# Altium PCB CPU-board-multi.PcbDoc (part 3 of 3)
Units mil, origin at the board's own origin, x right, y up, seen from the top; angles counter-clockwise.
Board outline 3937 x 2607 mil, 6 copper layers (L1, Power, L2, L3, CommonGND, L4), stack 84 mil thick; 312 components, 216 nets, 1011 pads, 419 vias.
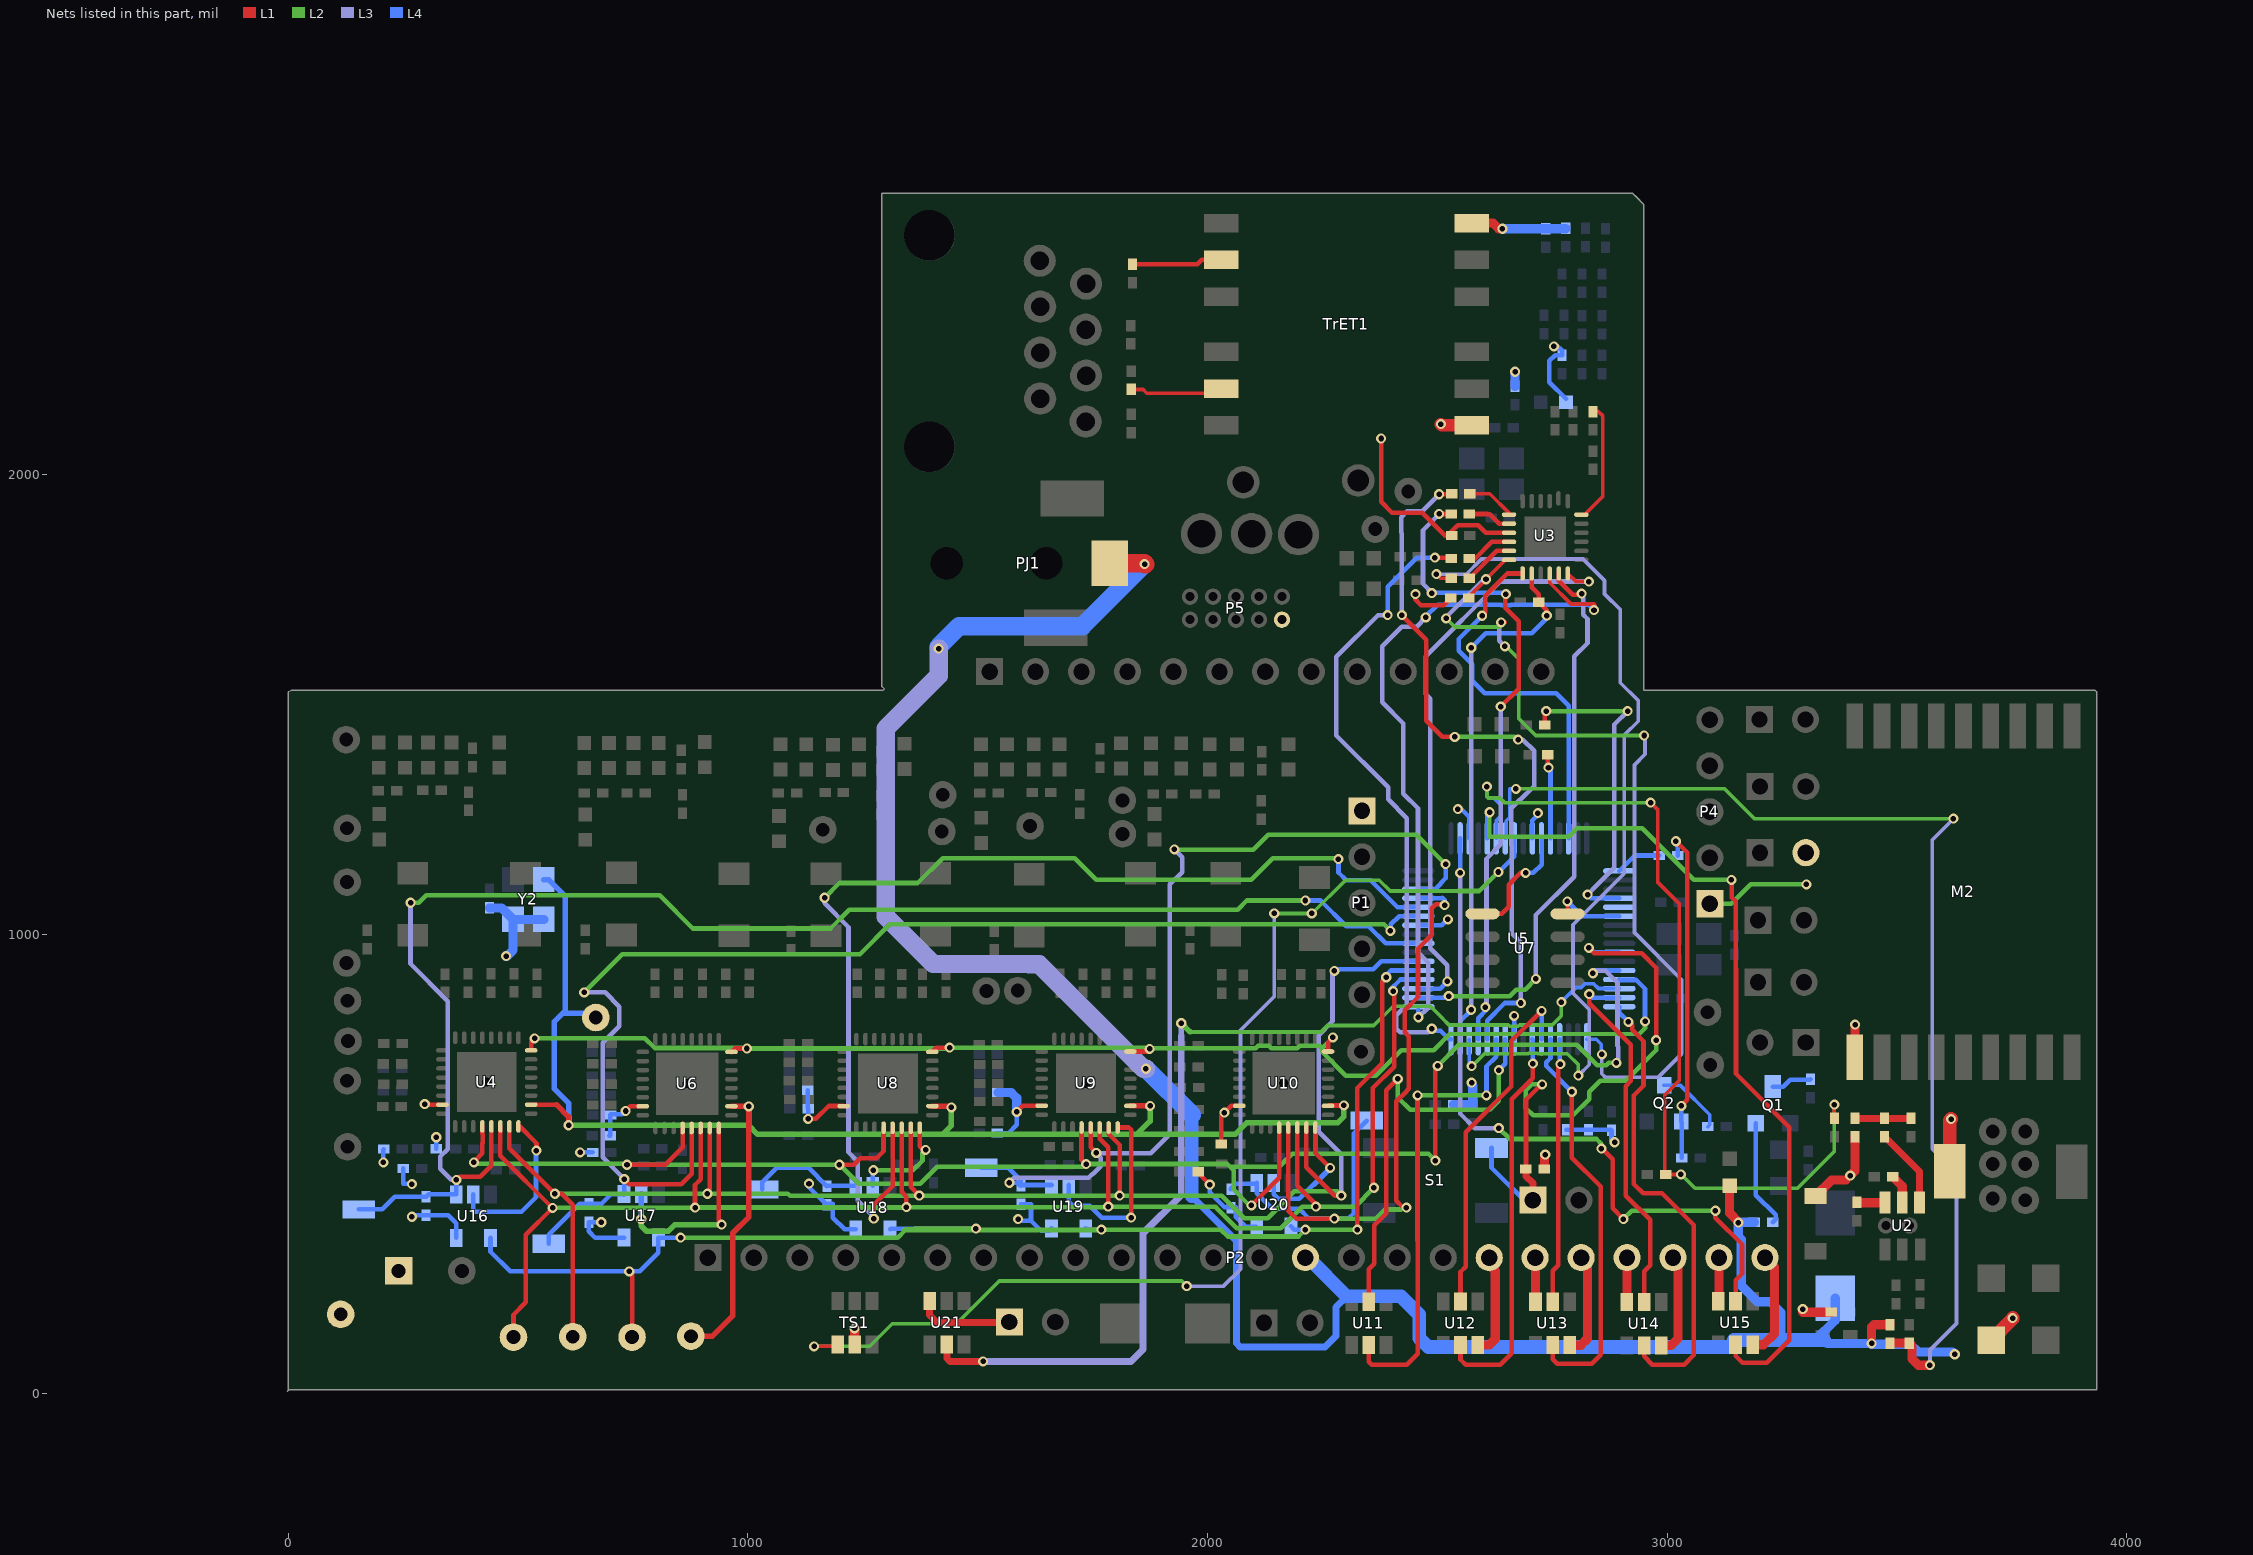
[diagram p7: the nets of this part, all layers, seen from the top]

## Via types
v1: diameter 22, hole 12, L1 to L4, 395 vias
v2: diameter 32, hole 20, L1 to L4, tented top, 19 vias
v3: diameter 22, hole 12, L1 to L4, tented top, 4 vias
v4: diameter 32, hole 18, L1 to L4, tented top, 1 vias

## Nets (pads, with @x,y where several pads share a name; then routed paths per layer and width w, separated by ;. In a path a pad name is that pad's centre, name@x,y a point inside that pad or via, vN(x,y) a via of type N, cw(c..) or ccw(c..) an arc to the next point about the centre after c; other vN are vias at no path point) (continued)
NetP2_18: P2.18 U12.3 | length 225.8
  L1 w20: U12.3@2588.13,106.53 2613.13,106.53 2626.13,119.53 2626.13,267.53 2613.13,280.53 P2.18@2613.13,296.53
NetP2_19: P2.19 U13.6 | length 96.2
  L1 w15: P2.19@2713.13,296.53 P2.19@2713.72,295.93
  L1 w20: U13.6@2713.72,200.53 P2.19@2713.72,295.93
NetP2_20: P2.20 U13.3 | length 226.4
  L1 w20: U13.3@2788.53,106.04 2812.64,106.04 2827.13,120.53 2827.13,282.53 P2.20@2813.13,296.53
NetP2_21: P2.21 U14.6 | length 96.7
  L1 w15: P2.21@2912.72,296.13 P2.21@2913.13,296.53
  L1 w20: U14.6@2912.72,200.02 P2.21@2912.72,296.13
NetP2_22: P2.22 U14.3 | length 223.4
  L1 w20: U14.3@2987.53,105.53 3009.13,105.53 3024.13,120.53 3024.13,285.53 P2.22@3013.13,296.53
NetP2_23: P2.23 U15.6 | length 95.6
  L1 w20: U15.6@3111.72,201.53 3113.13,202.93 P2.23@3113.13,296.53
NetP2_24: P2.24 U15.3 | length 231.4
  L1 w20: U15.3@3186.53,107.04 3209.64,107.04 3234.13,131.53 3234.13,275.53 P2.24@3213.13,296.53
NetP3_10: 
NetP5_1: P7.1 U21.6 | length 210.7
  L1 w15: U21.6@1395.72,202.02 1395.72,171.93 1412.13,155.53 1568.13,155.53 P7.1@1569.13,156.53
NetP6_1: P6.1 R121.2 S1.4 U5.42 | length 1289.4
  L1 w10: R121.2@2693.13,489.53 2693.13,640.19 2720.27,667.33 2721.93,667.33 v1(2728.13,673.53) ; v1(2830.13,970.53) 2831.13,970.53 2838.13,963.53 2838.13,961.53 2841.13,958.53 2945.13,958.53 2976.13,927.53 v1(2976.13,769.53)
  L1 w15: R121.2@2693.13,489.53 2693.13,473.53 2708.13,458.53 P6.1@2708.13,421.53
  L2 w10: v1(2728.13,673.53) 2705.43,673.53 2692.98,661.07 2692.98,621.7 2708.72,605.95 2795.34,605.95 2830.77,641.39 2830.77,657.71 2854.39,681.33 2909.98,681.33 2976.13,747.48 v1(2976.13,769.53)
  L4 w10: S1.4@2618.11,535.43 2618.17,535.37 2618.17,492.06 2689.32,420.91 2707.51,420.91 P6.1@2708.13,421.53 ; v1(2830.13,970.53) 2831.13,970.53 2841.02,960.64 U5.42@2896.13,960.64
NetQ1_C: Q1.C R10.2 | length 88.6
  L4 w10: Q1.C@3230.13,668.53 3253.13,668.53 3268.13,683.53 3311.13,683.53 R10.2@3312.13,684.53
NetQ1_E: Q1.E R4.1 | length 235.4
  L4 w10: Q1.E@3193.13,588.53 3193.13,432.57 3236.28,389.42 3236.28,379.69 R4.1@3230.13,373.53
NetQ2_B: Q2.B R13.1 R16.2 | length 735.7
  L1 w10: v1(3019.13,1202.53) 3043.73,1177.93 3043.73,640.13 3031.13,627.53 v1(3031.13,626.53)
  L4 w10: v1(3019.13,1202.53) 3023.13,1198.53 R13.1@3023.13,1171.53 ; Q2.B@3031.13,592.72 v1(3031.13,626.53) ; R16.2@3032.13,513.53 Q2.B@3032.13,591.33
NetQ2_C: Q2.C R9.1 | length 153.6
  L4 w8: Q2.C@2993.53,671.27 3029.24,671.27 3093.13,607.38 3093.13,585.53 R9.1@3089.13,581.53
NetR3_1: R3.1 R7.2 U5.23 | length 2481.7
  L1 w20: R3.1@3485.13,110.53 R7.2@3527.13,110.53 3533.13,104.53 3533.13,76.53 3547.13,62.53 v1(3572.13,62.53)
  L2 w8: v1(2671.13,1316.53) 3125.13,1316.53 3190.13,1251.53 v1(3623.13,1251.53)
  L3 w8: v1(3572.13,62.53) 3572.13,95.34 3629.98,153.2 3629.98,479.97 3576.83,533.12 3576.83,1205.24 v1(3623.13,1251.53)
  L4 w8: U5.23@2648.09,1208.67 2650.07,1210.65 2650.07,1246.89 2657.54,1254.36 2657.54,1316.53 v1(2671.13,1316.53)
NetR12_1: R12.1 R15.2 U5.22 | length 1933.5
  L1 w8: v1(2964.13,1286.53) 2980.13,1270.53 2980.13,1112.53 3026.93,1065.73 3026.93,682.33 2995.13,650.53 2995.13,479.53 R15.2@2997.13,477.53 3021.13,477.53 3021.13,478.53 3022.13,477.53 v1(3030.13,477.53) ; R12.1@3364.13,599.53 v1(3364.13,629.53)
  L2 w8: v1(2608.13,1321.53) 2608.13,1299.53 2611.13,1296.53 2636.13,1296.53 2646.13,1286.53 v1(2964.13,1286.53) ; v1(3030.13,477.53) 3022.13,477.53 3021.13,478.53 3030.13,478.53 3061.13,447.53 3284.13,447.53 3364.13,527.53 v1(3364.13,629.53)
  L4 w8: v1(2608.13,1321.53) 2608.13,1299.53 2611.13,1296.53 2623.13,1296.53 2638.13,1281.53 2638.13,1257.28 2628.41,1247.57 U5.22@2628.41,1208.67
NetR13_2: R13.2 U5.33 | length 101
  L4 w10: U5.33@2896.13,1137.8 2929.85,1171.53 R13.2@2983.13,1171.53
NetR14_2: R14.2 U2.6 | length 61.9
  L1 w20: R14.2@3413.13,416.53 3413.92,415.74 3473.53,415.74 U2.6@3474.32,416.53
NetR17_1: R17.1 U2.5 | length 64.5
  L1 w20: R17.1@3491.13,472.53 3511.72,451.93 U2.5@3511.72,416.53
NetR18_1: R18.1 R19.2 R21.2 | length 122
  L1 w15: R19.2@3409.13,599.53 R18.1@3473.13,599.53 R21.2@3531.13,599.53
NetR18_2: R18.2 U2.4 | length 174.5
  L1 w15: R18.2@3473.13,559.53 3549.13,483.53 U2.4@3549.13,416.53
NetR22_1: R22.1 U3.12 U5.49 | length 1981.4
  L1 w8: R22.1@2569.13,1731.53 2569.13,1734.34 2606.13,1771.34 v1(2606.13,1772.53) 2648.17,1814.58 U3.12@2656.23,1814.58 ; v1(2639.13,1678.53) 2645.13,1678.53 2647.13,1680.53 2648.13,1679.53 v1@2648.13,1678.53
  L2 w8: v1(2519.13,1687.53) 2539.13,1667.53 2539.13,1668.53 2635.13,1668.53 2645.13,1678.53 v1(2639.13,1678.53) ; v1(2647.13,1626.53) v1@2647.13,1629.3 ; v1@2647.13,1633.73 v1@2647.13,1629.3 ; v1(2950.13,1432.53) 2714.13,1432.53 2677.23,1469.43 2677.23,1599.2 v1@2647.13,1629.3
  L3 w8: v1(2519.13,1687.53) v1@2519.13,1689.53 ; v1@2600.13,1770.53 2604.13,1770.53 v1(2606.13,1772.53) ; v1@2635.13,1678.53 v1@2645.13,1678.53 ; v1(2858.13,738.53) 2858.13,696.71 2866.2,688.63 2980.38,688.63 3031.56,739.81 3031.56,901.23 2929.13,1003.66 2929.13,1368.57 2952.13,1391.57 2952.13,1430.53 v1(2950.13,1432.53)
  L3 w10: v1@2519.13,1689.53 v1@2600.13,1770.53 ; v1@2635.13,1678.53 2635.13,1638.53 v1(2647.13,1626.53)
  L4 w8: U5.49@2825.26,771.66 2845.99,771.66 2857.13,760.53 v1@2857.13,739.53
NetR28_2: R28.2 TrET1.11 | length 189.2
  L1 w8: R28.2@1834.13,2185.53 1860.13,2185.53 1868.2,2177.46 TrET1.11@2019.95,2177.46
NetR29_1: R29.1 U3.8 | length 94.9
  L1 w10: R29.1@2570.13,1914.53 2610.13,1914.53 2610.44,1914.21 2614.1,1914.21 2635,1893.32 U3.8@2656.23,1893.32
NetR29_2: R29.2 U5.61 | length 1430.1
  L1 w10: v1(2504.13,1914.53) R29.2@2530.13,1914.53 ; v1(2638.13,1495.53) 2677.23,1534.63 2677.23,1681.43 2648.13,1710.53 2648.13,1743.53 v1@2645.97,1741.37 ; v1@2643.5,1740.16 v1(2649.61,1740.16)
  L3 w10: v1@2488.13,1743.53 2469.13,1762.53 2469.13,1879.53 v1(2504.13,1914.53) ; v1(2604.67,841.73) 2607.33,841.73 2607.33,1164.73 2638.13,1195.53 v1(2638.13,1495.53)
  L4 w10: v1(2488.13,1742.53) 2489.13,1743.53 2648.13,1743.53 2645.97,1741.37 2642.28,1741.37 2643.5,1740.16 v1(2649.61,1740.16) ; U5.61@2589.04,771.66 2589.04,817.61 2607.13,835.7 2607.13,842.53 2605.47,842.53 v1(2604.67,841.73)
NetR30_1: R30.1 U3.7 | length 106
  L1 w8: R30.1@2571.13,1958.53 2614.13,1958.53 2656.23,1916.43 U3.7@2656.23,1913
NetR30_2: R30.2 U5.60 | length 1568.2
  L1 w10: v1(2423.13,1694.53) 2476.44,1641.21 2476.44,1464.22 2511.13,1429.53 v1(2538.13,1429.53) ; v1(2504.13,1957.53) 2530.13,1957.53 R30.2@2531.13,1958.53
  L2 w10: v1(2538.13,1429.53) 2669.13,1429.53 2676.13,1422.53 v1(2676.13,1423.53)
  L3 w10: v1(2423.13,1694.53) 2423.13,1872.07 2421.33,1873.87 2421.33,1907.73 2434.33,1920.73 2467.33,1920.73 v1(2504.13,1957.53) ; v1(2676.13,1423.53) 2686.43,1423.53 2710.93,1399.03 2710.93,1322.67 2680.98,1292.73 2679.87,1292.73 2661.33,1274.19 2661.33,1193.33 2662.13,1192.53 2662.13,1002.53 2682.13,982.53 v1(2682.13,850.53)
  L4 w10: U5.60@2608.72,771.66 2608.72,812.13 2647.13,850.53 v1(2682.13,850.53)
NetR31_1: R31.1 U3.11 | length 110.8
  L1 w10: R31.1@2570.13,1774.53 2629.86,1834.26 U3.11@2656.23,1834.26
NetR31_2: R31.2 U5.62 | length 1952.6
  L1 w8: 2507.13,1774.53 R31.2@2530.13,1774.53 ; v1@2574.86,712.25 v1(2574.87,713.04)
  L2 w8: v1@2574.86,712.25 2602.94,740.33 2697.68,740.33 2698.68,741.33 2717.57,741.33 2718.57,740.33 2783.01,740.33 2807.15,716.19 v1(2807.15,692.57)
  L3 w8: v1(2498.13,1783.53) 2563.13,1783.53 2596.13,1816.53 2817.13,1816.53 2864.13,1769.53 2864.13,1740.53 2898.13,1706.53 2898.13,1547.53 2937.13,1508.53 2937.13,1463.53 2907.13,1433.53 2907.13,1132.53 2795.34,1020.74 2795.34,871.56 2830.77,836.13 2830.77,716.19 v1(2807.15,692.57)
  L4 w8: U5.62@2569.35,771.66 2569.35,718.55 v1(2574.87,713.04)
NetR32_1: R32.1 U3.10 | length 101.2
  L1 w10: R32.1@2570.13,1817.53 2582.13,1817.53 2618.54,1853.95 U3.10@2656.23,1853.95
NetR32_2: R32.2 U5.64 | length 1391.6
  L1 w10: v1(2495.13,1819.53) R32.2@2528.13,1819.53
  L3 w10: v1(2392.13,1694.53) 2371.13,1694.53 2280.13,1603.53 2280.13,1432.53 2393.13,1319.53 2393.13,1293.53 2434.13,1252.53 2434.13,846.53 2411.13,823.53 2411.13,794.53 2419.13,786.53 2480.13,786.53 v1(2488.13,794.53)
  L4 w10: v1(2392.13,1694.53) 2392.13,1756.53 2455.13,1819.53 v1(2495.13,1819.53) ; v1(2488.13,794.53) 2488.13,793.53 2491.13,790.53 2507.13,790.53 2525.99,771.66 U5.64@2529.98,771.66
NetR33_2: R33.2 TrET1.8 | length 196.8
  L1 w10: R33.2@1837.2,2457.46 1914.13,2457.46 1977.55,2457.46 1987.46,2467.37 TrET1.8@2029.87,2467.37
NetR35_2: R35.1 U3.14 U5.63 | length 1170.4
  L1 w10: U3.14@2705.44,1785.05 2705.44,1755.21 2721.13,1739.53 R35.1@2721.13,1722.53 2738.33,1705.33 v1(2738.33,1693.41)
  L3 w10: v1(2573.71,835.94) 2574.13,836.36 v1(2574.13,1623.53) v1@2574.13,1629.53
  L4 w10: U5.63@2549.67,771.66 2549.67,811.07 2573.71,835.11 v1(2573.71,835.94) ; v1(2574.13,1623.53) 2605.33,1654.73 2705.33,1654.73 2739.13,1688.53 2739.13,1692.61 v1(2738.33,1693.41)
NetR37_2: R37.2 U3.24 | length 263.8
  L1 w8: U3.24@2813.71,1913 2820.6,1913 2860.45,1952.85 2860.45,2127.46 2850.46,2137.45 R37.2@2838.65,2137.45
NetR67_1: R67.1 U5.36 | length 715.5
  L1 w10: R67.1@2734.13,1455.53 2734.13,1482.53 v1(2737.13,1485.53)
  L2 w10: v1(2737.13,1485.53) v1(2914.13,1485.53)
  L3 w10: v1(2827.13,1086.53) 2846.13,1105.53 2885.13,1144.53 2885.13,1456.53 v1(2914.13,1485.53)
  L4 w10: v1(2827.13,1086.53) 2834.9,1078.75 U5.36@2896.13,1078.75
NetR68_1: R68.1 U5.28 | length 181.7
  L1 w10: v1@2740.13,1364.53 R68.1@2740.13,1390.53
  L4 w10: v1(2742.13,1362.53) 2746.52,1358.13 U5.28@2746.52,1208.67
NetR113_2: pad.1@153.54,401.57 R113.2 U4.29 U5.8 U16.1 | length 3388.8
  L1 w10: v1(366.13,465.53) 373.13,472.53 418.13,472.53 441.97,496.37 U4.29@441.97,582.07
  L2 w10: v1(266.13,1068.53) 284.13,1068.53 300.13,1084.53 808.13,1084.53 880.13,1012.53 1179.93,1012.53 1221.13,1053.73 2065.95,1053.73 2085.75,1073.53 v1(2213.13,1073.53)
  L3 w10: v1(266.13,1068.53) 266.13,935.53 347.13,854.53 347.13,532.53 331.13,516.53 331.13,489.53 355.13,465.53 v1(366.13,465.53)
  L4 w10: pad.1@153.54,401.57 204.72,401.57 231.68,428.53 R113.2@300.13,428.53 305.61,434.02 U16.1@365.32,434.02 365.32,464.72 v1(366.13,465.53) ; v1(2213.13,1073.53) 2246.13,1073.53 2302.13,1017.53 2350.52,1017.53 2387.72,980.32 U5.8@2459.12,980.32
NetR114_2: pad.1@566.93,326.77 R114.2 U5.11 U6.29 U17.1 | length 2914.3
  L1 w10: v1(731.13,467.53) 742.13,456.53 855.13,456.53 877.81,479.21 U6.29@877.81,578.61
  L2 w10: v1(644.13,873.53) 727.13,956.53 1244.13,956.53 1309.13,1021.53 2384.13,1021.53 v1(2398.13,1007.53)
  L3 w10: v1(644.13,873.53) 689.46,873.53 720.47,842.52 720.47,800.13 684.13,763.78 684.13,514.53 v1(731.13,467.53)
  L4 w10: pad.1@566.93,326.77 566.93,346.46 634,413.53 R114.2@654.13,413.53 681.65,413.53 700.85,432.72 700.85,434.12 U17.1@729.72,433.53 ; U17.1@730.72,434.53 731.13,434.93 v1(731.13,467.53) ; v1(2398.13,1007.53) 2399.3,1008.7 2399.3,1021.53 2417.15,1039.38 U5.11@2459.12,1039.38
NetR115_2: pad.1@1031.5,444.88 R115.2 U18.1 | length 249.2
  L4 w10: pad.1@1031.5,444.88 1031.5,460.63 1062.99,492.13 1132.19,492.13 1172.13,452.19 R115.2@1172.13,451.53 ; R115.2@1172.13,452.53 U18.1@1234.72,452.53
NetR116_2: pad.1@1507.87,492.13 R116.2 U5.14 U9.29 U19.1 | length 2056.4
  L1 w10: U9.29@1745.81,579.62 1745.81,536.84 v1(1758.13,524.53)
  L2 w10: v1@1929.13,1183.53 2099.6,1183.53 2132.6,1216.53 2362.27,1216.53 2362.61,1216.19 2454.46,1216.19 v1(2518.13,1152.53)
  L3 w10: v1(1569.13,459.53) 1579.33,470.73 1741.67,470.73 1750.27,479.33 1751.39,479.33 1767.72,495.65 1767.72,513.94 v1@1758.13,523.53 ; v1(1758.13,524.53) v1@1758.13,523.53 ; v1(1928.13,1184.53) 1944.94,1167.71 1944.94,1135.35 1918.13,1108.53 1918.13,564.53 1877.13,523.53 v1@1758.13,523.53
  L4 w10: pad.1@1507.87,492.13 1566.93,492.13 1594.13,464.93 R116.2@1594.13,454.53 ; v1(1569.13,459.53) 1587.13,459.53 R116.2@1592.13,454.53 ; R116.2@1591.13,454.53 R116.2@1592.13,454.53 ; U19.1@1660.72,454.53 R116.2@1594.13,454.53 ; U5.14@2459.12,1098.43 2495.41,1098.43 2507.35,1110.37 2507.35,1110.75 2518.13,1121.53 v1(2518.13,1152.53) ; R116.2@1592.13,454.53 R116.2@1594.13,452.53 R116.2@1594.13,454.53
NetR117_2: pad.1@2346.46,594.49 R117.2 U5.13 U10.29 U20.1 | length 1796.6
  L1 w10: U10.29@2175.87,579.61 2175.87,398.79 2193.13,381.53 v1(2276.13,381.53) ; v1(2433.07,405.51) 2425.61,405.51 2411.13,419.99 2411.13,636.53 2433.33,658.73 2433.33,659.39 2438.13,664.19 2438.13,777.53 2429.13,786.53 2429.13,834.53 2458.13,863.53 2458.13,968.55 2488.25,998.68 2488.25,1056.65 2496.63,1065.03 2514.63,1065.03 v1(2516.13,1063.53)
  L2 w10: v1(2276.13,381.53) 2366.19,381.53 2385.89,401.23 2421.32,401.23 2425.61,405.51 v1(2433.07,405.51)
  L4 w10: R117.2@2051.13,445.53 2051.13,446.53 2062.13,457.53 U20.1@2105.64,457.53 ; U20.1@2107.13,459.02 2107.13,436.53 2141.13,402.53 2199.93,402.53 2220.93,381.53 v1(2276.13,381.53) 2306.72,381.53 2318.9,393.7 2318.9,566.93 pad.1@2346.46,594.49 ; U5.13@2459.12,1078.75 2510.9,1078.75 2511.13,1078.53 2511.13,1079.53 2516.13,1074.53 v1(2516.13,1063.53)
NetTP7_1: TP7.1@876.13,125.53 TP13.1 U4.2 U6.2 U8.2 U9.2 U10.2 Y2.3 | length 3421.4
  L1 w10: U4.2@528.58,629.32 583.34,629.32 ; U10.2@2262.48,626.86 2263.15,627.53 v1(2297.13,627.53)
  L1 w12: 583.34,629.32 610.13,602.53 v1(610.13,584.53) ; TP7.1@876.13,125.53 923.13,125.53 967.13,169.53 967.13,349.53 1002.13,384.53 v1(1002.13,625.53) U6.2@964.75,625.53 ; U8.2@1401.58,626.2 1402.43,625.35 1441.3,625.35 v1(1443.13,623.53) ; U9.2@1832.42,626.86 1874.79,626.86 v1(1875.13,626.53)
  L2 w12: v1(610.13,584.53) 1001.13,584.53 ; v1(1002.13,625.53) 1002.13,585.53 1001.13,584.53 ; v1(1443.13,623.53) 1443.13,583.53 1424.93,565.33 ; v1(1875.13,626.53) 1875.13,593.53 1846.93,565.33 ; v1(2297.13,627.53) 2297.13,603.53 2283.13,589.53 2085.13,589.53 2060.93,565.33 1846.93,565.33 ; 1001.13,584.53 1021.13,564.53 1263.05,564.53 1263.85,565.33 1424.93,565.33 ; 1424.93,565.33 1846.93,565.33
  L4 w12: Y2.3@556.06,1119.14 566.51,1119.14 602.36,1083.29 602.36,833.16 579.13,809.93 579.13,663.53 610.13,632.53 v1(610.13,584.53) ; 597.93,828.73 659.46,828.73 TP13.1@669.29,818.9
NetTP8_1: TP8.1 U4.30 U5.4 U6.30 U8.30 U9.30 U10.30 | length 3638.8
  L1 w10: U4.30@461.65,582.07 461.65,518.06 v1(575.13,404.58) 517.13,346.58 517.13,199.07 490.13,172.07 TP8.1@490.13,123.53 ; v1(885.13,405.53) 885.13,454.53 897.5,466.9 U6.30@897.5,578.61 ; U8.30@1334.65,579.07 1334.65,440 1345.13,429.53 v1(1345.13,406.53) ; U9.30@1765.5,579.62 1765.5,555.16 1784.13,536.53 v1(1784.13,407.53) ; U10.30@2195.55,579.61 2195.55,453.1 2236.13,412.53 v1(2236.13,407.53) ; v1@2360.13,448.47 2360.13,665.53 2406.13,711.53 2406.13,870.53 v1@2400.13,876.53
  L2 w10: v1(575.13,404.58) 884.18,404.58 v1(885.13,405.53) 1345.13,405.53 v1(1345.13,406.53) 1783.13,406.53 v1(1784.13,407.53) 2018.13,407.53 2018.13,406.33 2063.93,360.53 2159.13,360.53 2206.13,407.53 v1(2236.13,407.53) 2321.32,407.53 v1(2362.27,448.47)
  L4 w10: v1(2404.13,876.53) 2398.13,876.53 2398.13,879.53 2420.18,901.58 U5.4@2459.12,901.58
NetTP9_1: TP9.1 U4.31 U5.6 U6.31 U8.31 U9.31 U10.31 | length 3643.2
  L1 w10: U4.31@481.34,582.07 481.34,534.32 v1(580.13,435.53) 595.13,435.53 619.13,411.53 TP9.1@619.13,124.53 ; v1(912.13,435.53) 917.18,440.58 U6.31@917.18,578.61 ; U8.31@1354.34,579.07 1354.34,450.32 v1(1373.13,431.53) ; U9.31@1785.18,579.62 1785.18,565.38 1809.03,541.53 1809.13,541.53 v1@1809.13,430.53 ; U10.31@2215.24,579.61 2215.24,493.14 2276.85,431.53 v1(2291.13,431.53)
  L2 w10: v1(580.13,435.53) v1(912.13,435.53) 1087.13,435.53 1091.93,430.73 1372.93,430.73 1373.13,430.93 v1(1373.13,431.53) v1(1809.13,431.53) 2031.13,431.53 2080.13,382.53 2131.13,382.53 2189.13,440.53 2282.13,440.53 v1(2291.13,431.53)
  L3 w10: v1(2276.13,920.53) 2272.13,916.53 2272.13,810.53 2242.13,780.53 2242.13,570.53 2291.13,521.53 v1(2291.13,431.53)
  L4 w10: v1@2279.13,923.53 2360.94,923.53 2378.37,940.95 U5.6@2459.12,940.95
NetTP10_1: TP10.1 U5.5 U16.4 U17.4 U18.4 U19.4 U20.4 | length 3218.8
  L1 w10: v1(742.13,266.53) 748.13,260.53 TP10.1@748.13,123.53 ; v1(2326.13,357.53) 2326.13,665.53 2380.13,719.53 2380.13,897.53 v1(2389.13,906.53)
  L2 w10: v1(853.64,340.04) 1326.64,340.04 1343.13,356.53 ; v1(1496.13,359.53) 1363.13,359.53 1360.13,356.53 ; v1(2326.13,357.53) v1(2213.13,357.53) 2198.13,342.53 2044.13,342.53 2029.13,357.53 v1(1769.13,357.53) 1768.13,356.53 1360.13,356.53 ; 1343.13,356.53 1340.13,356.53 1342.13,358.53 1358.13,358.53 1360.13,356.53 ; 1343.13,356.53 1360.13,356.53
  L4 w10: U16.4@440.13,339.53 440.13,309.53 483.13,266.53 v1(742.13,266.53) 765.13,266.53 805.53,306.93 U17.4@805.53,340.04 v1(853.64,340.04) ; U18.4@1309.53,358.04 1311.02,359.53 v1(1496.13,359.53) ; U19.4@1735.53,360.04 1738.04,357.53 v1(1769.13,357.53) ; U20.4@2181.93,364.53 2188.93,357.53 v1(2213.13,357.53) ; v1@2389.13,903.53 v1(2389.13,906.53) ; v1@2389.13,911.53 2398.87,921.27 U5.5@2459.12,921.27
NetTS1_1: TS1.1 U5.24 | length 2504.4
  L1 w8: v1(1144.13,103.53) 1191.32,103.53 TS1.1@1195.32,107.53
  L2 w8: v1(1144.13,103.53) 1265.13,103.53 1314.13,152.53 1454.13,152.53 1547.13,245.53 1944.13,245.53 v1(1955.13,234.53) ; v1(2145.33,1045.33) v1(2227.07,1045.33) 2227.07,1044.58 2227.13,1044.53 2300.36,1117.76 2374.08,1117.76 2397.7,1094.14 2545.74,1094.14
  L2 w10: 2545.74,1094.14 2591.74,1094.14 v1(2633.13,1135.53)
  L3 w8: v1(1955.13,234.53) 2035.13,234.53 2071.8,271.2 2071.8,791.2 2145.33,864.73 v1(2145.33,1045.33) ; v1@2222.27,1040.53 v1(2227.07,1045.33)
  L4 w10: v1(2633.13,1135.53) 2634.13,1135.53 2667.78,1169.18 U5.24@2667.78,1208.67
NetU3_13: U3.13 U5.30 | length 843.7
  L1 w10: v1(2597.68,1692.97) 2604.13,1699.41 2604.13,1736.87 2652.3,1785.05 U3.13@2685.76,1785.05
  L4 w10: v1(2597.68,1692.97) 2547.13,1642.41 2547.13,1616.87 2576.47,1587.53 2576.27,1587.53 2576.27,1551.38 2603.13,1524.53 2758.65,1524.53 2785.89,1497.29 U5.30@2785.89,1208.67
NetU3_16: U3.16 U5.1 | length 1526.1
  L1 w8: U3.16@2744.81,1785.05 2744.81,1764.77 2791.05,1718.53 2840.24,1718.53
  L1 w10: 2840.24,1718.53 2841.13,1717.65 v1(2841.13,1705.53)
  L3 w10: v1(2459.13,819.53) 2480.13,840.53 2480.13,938.53 2458.13,960.53 2458.13,1274 2426.33,1305.8 2426.33,1458.73 2380.13,1504.93 2380.13,1626.53 2423.13,1669.53 2455.13,1669.53 v1(2475.13,1689.53)
  L4 w10: v1(2459.13,819.53) 2459.12,835.54 ; v1@2474.13,1690.53 2500.81,1717.21 2638.89,1717.21 2639.75,1716.36 2659.46,1716.36 2660.32,1717.21 2829.44,1717.21 v1(2841.13,1705.53)
NetU3_17: U3.17 U5.2 | length 1235.2
  L1 w10: U3.17@2764.5,1785.05 2764.5,1768.84 2794.81,1738.53 v1@2814.18,1738.53
  L2 w10: v1(2525.13,865.53) 2658.13,865.53 2672.13,879.53 2691.13,879.53 v1(2714.63,903.03)
  L3 w10: v1(2714.63,903.03) 2714.63,1042.03 2798.13,1125.53 2798.13,1604.87 2826.93,1633.67 2826.93,1686.07 2817.33,1695.67 2817.33,1738.87 2816.98,1738.53 v1(2814.18,1741.33)
  L4 w10: U5.2@2459.12,862.21 v1@2515.81,862.21 ; v1@2522.13,868.53 v1(2525.13,865.53)
NetU3_18: U3.18 U5.3 | length 1271
  L1 w8: U3.18@2784.18,1785.05 2801.7,1767.53 v1@2829.13,1767.53
  L3 w10: v1(2522.13,897.53) 2522.13,932.7 2485.13,969.7 2485.13,1512.53 2475.13,1522.53 2475.13,1605.05 2637.61,1767.53 v1(2830.13,1767.53)
  L4 w10: U5.3@2459.12,881.9 2506.5,881.9 v1(2522.13,897.53)
NetU4_8: U4.8 U5.45 U6.8 U8.8 U9.8 U10.8 | length 2878.2
  L1 w10: U4.8@528.58,747.43 528.58,765.98 v1(536.13,773.53) ; U6.8@964.42,743.97 971.98,751.53 v1(998.13,751.53) ; U8.8@1401.58,744.43 1410.34,753.18 1438.78,753.18 v1(1439.13,753.53) ; U9.8@1832.42,744.97 1868.57,744.97 v1(1874.13,750.53) ; U10.8@2262.48,744.97 2262.48,764.88 v1(2273.13,775.53)
  L2 w9: 2527.62,783.12 2939.72,783.12
  L2 w10: v1(536.13,773.53) 776.13,773.53 797.13,752.53 997.13,752.53 v1(998.13,751.53) v1(998.13,751.53) 1437.17,751.57 v1(1439.13,753.53) 1871.13,753.53 v1(1874.13,750.53) 1875.71,752.12 2105.09,752.12 2110.12,757.15 2133.98,757.15 2139.01,752.12 2195.64,752.12 2200.67,757.15 2244.68,757.15 2249.71,752.12 ; v1(2273.13,775.53) 2249.71,752.12 ; 2527.62,783.12 2492.19,747.69 2421.32,747.69 2366.2,692.57 2301.09,692.57 2249.71,743.94 2249.71,752.12 ; 2939.72,783.12 2952.13,795.53 v1(2952.13,810.53)
  L4 w10: U5.45@2896.13,901.58 2897.11,900.6 2933.4,900.6 2952.13,881.88 v1(2952.13,810.53)
NetU4_28: U4.28 U5.44 U6.28 U8.28 U9.28 U10.28 | length 3891
  L1 w10: v1(404.13,503.53) 404.13,505.53 422.28,523.69 422.28,545.03 422.93,545.67 422.93,565.39 422.28,566.03 U4.28@422.28,582.07 ; v1(737.13,498.53) 820.13,498.53 858.13,536.53 U6.28@858.13,578.61 ; v1(1199.13,498.53) 1230.73,498.53 1244.93,512.73 1279.98,512.73 1295.28,528.03 U8.28@1295.28,579.07 ; U9.28@1726.13,579.62 1726.13,510.09 v1(1736.22,500) ; v1(2095.63,410.03) 2156.18,470.58 U10.28@2156.18,579.61 ; v1(2496.13,507.53) 2495.89,507.77 2495.89,708.29 v1(2501.13,713.53)
  L2 w10: v1(404.13,503.53) 406.93,500.73 734.93,500.73 v1(737.13,498.53) v1(1199.13,498.53) 1200.13,498.53 1241.13,457.53 1375.13,457.53 1412.13,494.53 v1@1728.23,494.53 ; v1(1736.22,500) 1736.22,500.18 2043.48,500.18 2049.13,494.53 ; v1(2095.63,410.03) 2091.63,410.03 2056.93,444.73 2056.93,486.73 2049.13,494.53 ; v1(2496.13,507.53) 2481.13,522.53 2184.35,522.53 2156.35,494.53 2049.13,494.53 ; v1(2501.13,713.53) 2547.09,759.5 2803.5,759.5 2848.27,714.73 2867.98,714.73 2873.38,720.13 v1(2889.83,720.13)
  L3 w10: v1(2838.65,915.33) 2840.94,915.33 2842.58,916.98 2842.58,920.91 2866.2,920.91 2892.33,894.79 2892.33,757.16 2893.93,755.56 2893.93,724.23 v1(2889.83,720.13)
  L4 w10: v1(2838.65,915.33) 2844.58,921.27 U5.44@2896.13,921.27
NetU4_32: U4.32 U16.2 | length 360.2
  L1 w10: U4.32@501.02,582.07 503.58,582.07 540.13,545.53 v1(540.13,529.53)
  L4 w10: U16.2@402.72,434.02 402.72,395.93 507.53,395.93 539.13,427.53 539.13,528.53 v1(540.13,529.53)
NetU5_12: U5.12 U8.29 | length 2385.2
  L1 w10: v1(1274.13,381.53) 1274.13,411.53 1314.97,452.37 U8.29@1314.97,579.07
  L2 w10: v1(1167.13,1079.53) 1199.13,1111.53 1370.13,1111.53 1424.13,1165.53 1711.13,1165.53 1758.13,1118.53 2095.31,1118.53 2142.31,1165.53 2283.13,1165.53 v1(2285.13,1163.53)
  L3 w10: v1(1167.13,1079.53) 1167.13,1067.53 1219.13,1015.53 1219.13,525.53 1239.13,505.53 1239.13,420.53 1275.13,384.53 1274.13,383.53 v1(1274.13,381.53)
  L4 w10: v1(2285.13,1163.53) 2285.13,1134.53 2301.89,1117.76 2354.89,1117.76 2413.59,1059.06 U5.12@2459.12,1059.06
NetU5_18: U5.18 U15.5 | length 1541.1
  L1 w10: v1(2857.13,533.53) 2859.13,533.53 2882.13,510.53 2882.13,403.53 v1(2905.13,380.53) ; v1(3105.13,398.53) 3105.13,383.53 3163.13,325.53 3163.13,261.14 3149.13,247.14 U15.5@3149.13,201.53
  L2 w10: v1(2633.92,578.39) 2657.54,554.77 2657.54,554.53 2846.47,554.53 2856.47,544.53 ; v1(2905.13,380.53) 2923.13,398.53 v1(3105.13,398.53)
  L3 w10: v1(2549.67,1133.53) 2549.67,609.98 2581.26,578.39 v1(2633.92,578.39)
  L4 w10: v1(2549.67,1133.53) U5.18@2549.67,1208.67
NetU5_21: U5.21 U15.2 | length 1922
  L1 w10: v1@3141.13,1118.53 3141.13,1080.03 3149.13,1072.03 3149.13,925.68 3150.13,924.68 3150.13,696.53 3266.13,580.53 3266.13,116.52 3217.13,67.53 3164.13,67.53 3149.13,82.53 U15.2@3149.13,107.04
  L2 w10: v1(2614.13,1265.53) 2611.13,1265.53 2609.13,1263.53 2613.13,1259.53 2613.13,1212.53 2786.13,1212.53 2804.13,1230.53 2946.13,1230.53 3058.13,1118.53 v1(3140.13,1118.53)
  L4 w10: U5.21@2608.72,1208.67 2608.72,1263.13 2611.13,1265.53 v1(2614.13,1265.53)
NetU5_27: U5.27 U7.1 | length 257.8
  L1 w10: U7.1@2598.61,1044.53 2640.13,1044.53 2655.63,1060.03 2655.63,1108.03 2681.13,1133.53 v1(2692.13,1133.53)
  L4 w10: v1(2692.13,1133.53) 2709.13,1133.53 2727.13,1151.53 U5.27@2727.13,1208.38
NetU5_37: U5.37
NetU5_46: U5.46 U21.2 | length 2278.1
  L1 w15: U21.2@1433.13,107.53 1433.13,77.53 1440.13,70.53 v1@1511.13,70.53
  L2 w8: 1962.13,787.53 2247.13,787.53 2261.13,801.53 2362.13,801.53 2404.13,843.53 2485.13,843.53 2511.33,817.33 ; 2510.93,817.33 2525.45,802.8 2654.61,802.8 2657.68,799.73 2676.57,799.73 2679.65,802.8 2750.44,802.8 2770.13,822.49 v1(2770.13,852.53)
  L2 w12: v1(1943.13,806.53) 1962.13,787.53
  L3 w12: 1943.13,778.53 v1(1943.13,806.53)
  L3 w15: v1(1512.13,70.53) 1834.13,70.53 1860.13,96.53 1860.13,349.53 1943.13,432.53 1943.13,778.53
  L4 w8: v1(2770.13,852.53) 2801.93,884.33 2813.12,884.33 2821.32,892.53 2840.21,892.53 2850.84,881.9 U5.46@2896.13,881.9
  L4 w15: v1@1511.13,70.53 v1(1512.13,70.53)
NetU5_47: U5.47 U14.5 | length 804.6
  L1 w10: v1(2830.77,869.73) 2830.77,849.89 2921.32,759.33 2921.32,680.76 2910.13,669.56 2910.13,431.53 2963.13,378.53 2963.13,279.53 2950.13,266.53 U14.5@2950.13,200.02
  L4 w10: v1@2830.77,862.21 U5.47@2896.13,862.21
NetU5_48: U5.48 U14.2 | length 1016
  L1 w10: v1(2916.13,809.53) 2923.98,801.68 2923.98,792.27 2948.88,767.37 2948.88,670.22 2927.93,649.26 2927.93,456.73 2948.13,436.53 2989.13,436.53 3058.13,367.53 3058.13,84.53 3037.13,63.53 2968.13,63.53 2950.13,81.53 U14.2@2950.13,105.53
  L4 w10: U5.48@2897.13,841.53 U5.48@2896.13,842.53 2896.13,829.53 v1(2916.13,809.53)
NetU5_52: U5.52 U13.5 | length 579.6
  L1 w10: U13.5@2751.13,200.53 2751.13,267.53 2763.13,279.53 2763.13,713.53 2767.13,717.53 v1(2768.13,717.53)
  L4 w10: U5.52@2766.2,771.66 2766.2,719.45 v1(2768.13,717.53)
NetU5_53: U5.53 U13.2 | length 886.7
  L1 w10: U13.2@2751.13,106.04 2751.13,75.53 2761.13,65.53 2836.13,65.53 2855.45,84.86 2855.45,451.2 2793.13,513.53 v1(2793.13,657.53)
  L4 w10: U5.53@2746.52,771.66 2746.52,730.92 2737.13,721.53 2737.13,713.53 v1(2793.13,657.53)
NetU5_54: U5.54 U12.5 | length 767.6
  L1 w10: U12.5@2550.72,201.02 2550.72,265.13 2562.13,276.53 2562.13,569.53 2661.42,668.82 2661.42,767.82 v1(2727.13,833.53)
  L4 w10: U5.54@2726.83,771.66 2727.13,771.95 v1(2727.13,833.53)
NetU5_55: U5.55 U12.2 | length 860.7
  L1 w10: U12.2@2550.72,106.53 2550.72,74.93 2562.13,63.53 2618.38,63.53 2637.13,63.53 2662.13,88.53 2662.13,641.19 2708.13,687.19 v1(2708.13,718.53)
  L4 w10: U5.55@2707.15,771.66 2708.13,770.69 v1(2708.13,718.53)
NetU5_58: U5.58 U11.5 | length 934.7
  L1 w10: U11.5@2351.13,200.53 2351.13,271.53 2363.13,283.53 2363.13,366.53 2389.13,392.53 2389.13,660.53 v1(2414.13,685.53)
  L2 w10: v1(2414.13,685.53) 2414.13,644.93 2440.94,618.11 2614.17,618.11 2634.13,638.06 v1@2634.13,701.53 ; v1(2634.13,704.53) v1@2634.13,701.53 ; v1@2637.13,704.53 v1@2634.13,701.53
  L4 w10: v1(2634.13,704.53) 2648.09,718.5 U5.58@2648.09,771.66
NetU5_59: U5.59 U11.2 | length 999.1
  L1 w10: U11.2@2351.13,106.04 2351.13,69.53 2357.13,63.53 2434.13,63.53 2457.93,87.33 2457.93,332.39 2457.13,333.19 v1(2457.13,649.53)
  L2 w10: v1(2457.13,649.53) v1(2607.13,649.53)
  L4 w10: v1(2607.13,649.53) 2607.13,712.53 2628.41,733.81 U5.59@2628.41,771.66
NetU6_32: U6.32 U17.2 | length 468.4
  L1 w10: U6.32@936.87,578.61 936.87,374.79 v1(943.13,368.53)
  L2 w12: v1(768.13,380.53) 768.13,365.53 780.13,353.53 827.13,353.53 827.13,354.53 841.13,368.53 v1(943.13,368.53)
  L4 w12: v1(768.13,380.53) U17.2@768.13,434.53
NetU8_32: U8.32 U18.2 | length 235.3
  L1 w10: U8.32@1374.02,579.07 1374.02,539.13 1384.63,528.53 v1(1386.93,530.83)
  L2 w10: v1(1273.13,486.53) 1359.13,486.53 1380.13,507.53 1380.13,524.53 1386.43,530.83 v1(1386.93,530.83)
  L4 w10: U18.2@1272.13,452.53 1272.13,486.53 v1(1273.13,486.53)
NetU9_32: U9.32 U19.2 | length 408.9
  L1 w10: U9.32@1804.87,579.62 1829.04,579.62 1834.13,574.53 v1(1834.13,383.53)
  L4 w10: U19.2@1698.13,454.53 1698.13,418.53 1707.13,409.53 1744.13,409.53 1770.13,383.53 v1(1834.13,383.53)
NetU10_32: U10.32 U20.2 | length 323.7
  L1 w10: U10.32@2234.92,579.61 2235.13,579.41 2235.13,523.53 v1(2267.13,491.53)
  L4 w10: U20.2@2144.53,459.02 2144.53,434.13 2154.13,424.53 2200.13,424.53 v1@2262.13,486.53 ; 2233.13,455.53 2267.13,489.53 v1(2267.13,491.53)
VCC: 
VCC1: 
VCC=3.3V: C10.1 C13.1 C15.1 C23.1 C29.1 C30.1 C31.1 C34.2 C37.2 C38.1 C40.2 C41.2 C44.2 C45.2 C56.1 C57.1 C74.1 C75.1 C95.1 C97.1 C108.1 C110.2 C125.2 D5.A J6.2 L2.2 L3.1 M2.10 P1.1 P4.1 P5.9 R19.1 R20.1 R22.2 R36.2 R59.2 R113.1 R114.1 R115.1 R116.1 R117.1 R121.1 TP1.1 TrET1.1 TrET1.6 TS1.2 U3.9 U4.23 U5.10 U5.19 U5.26 U5.38 U5.57 U6.23 U7.8 U8.23 U9.23 U10.23 U16.5 U17.5 U18.5 U19.5 U20.5 Y2.1 Y2.4 | length 4272.3
  L1 w10: v1(297.13,630.53) 298.34,629.32 U4.23@335.67,629.32 ; v1@630.13,525.53 v1(635.13,525.53) ; v1(734.13,615.53) 744.46,625.86 U6.23@771.51,625.86 ; v1(1131.13,598.53) 1148.13,598.53 1175.91,626.32 U8.23@1208.67,626.32 ; v1(1585.13,613.53) 1598.46,626.86 U9.23@1639.51,626.86 ; C108.1@1980.13,483.53 1980.13,480.53 v1(2005.13,455.53) ; C110.2@2030.13,543.53 2030.13,605.28 v1(2036.99,612.15) 2036.99,612.39 2051.46,626.86 U10.23@2069.57,626.86 ; v1(2377.95,2078.74) 2377.95,1940.94 2401.57,1917.32 2467.67,1917.32 2517.47,1867.53 R36.2@2531.13,1867.53 2531.13,1877.17 2544.28,1890.33 2588.93,1890.33 2605.63,1873.63 U3.9@2656.23,1873.63 ; v1(2452.75,1740.15) 2452.75,1743.9 2452.13,1744.53 2452.13,1728.69 2464.63,1716.19 2513.79,1716.19 R22.2@2529.13,1731.53 ; TrET1.1@2588.33,2095.33 TrET1.1@2589.13,2094.53 ; v1(2754,2279.31) v1@2754,2281.15 ; v1(2783.13,1071.53) 2783.65,1071.01 U7.8@2783.65,1044.53
  L1 w20: v1(1232.13,142.53) 1232.72,141.93 TS1.2@1232.72,107.53 ; TrET1.6@2574.87,2547.37 2621.64,2547.37 2633.92,2535.09 v1(2641.8,2535.09) ; R121.1@2733.13,489.53 2733.13,518.53 v1(2735.13,520.53) ; v1(3295.34,184.69) 3295.34,178.32 3296.13,177.53 3358.13,177.53 R20.1@3357.13,178.53 ; D5.A@3323.13,430.53 3358.13,465.53 3389.13,465.53 ; v1(3398.63,475.03) 3409.13,485.53 R19.1@3409.13,559.53 ; M2.10@3408.79,732.53 3408.79,803.2 v1(3409.13,803.53)
  L1 w27.56: v1(2507.94,2109.89) 2510.46,2107.37 TrET1.1@2574.87,2107.37
  L1 w30: L2.2@3615.13,484.53 3615.13,595.03 v1(3618.17,598.08) ; C10.1@3705.13,116.53 3752.03,163.43 v1(3752.03,165.01)
  L2 w10: v1(297.13,630.53) 304.7,630.53 v1@303.7,631.53 ; v1(2719.13,1263.53) v1@2719.13,1265.53 ; P4.1@3093.13,1066.53 3140.13,1066.53 3182.13,1108.53 v1(3303.13,1108.53)
  L3 w10: v1@2885.13,546.53 v1(2886.13,547.53)
  L4 w10: v1(207.13,503.53) 207.13,531.53 C41.2@208.13,532.53 ; C30.1@250.13,490.53 250.13,457.53 269.13,457.53 v1(269.13,456.53) ; v1(269.13,385.53) 272.13,388.53 R113.1@300.13,388.53 348.13,388.53 365.32,371.33 U16.5@365.32,339.53 ; C29.1@322.13,533.53 v1(322.13,558.53) ; v1(635.13,525.53) 637.13,523.53 639.13,525.53 C37.2@662.13,525.53 ; v1(681.13,373.53) R114.1@654.13,373.53 654.13,353.53 667.61,340.04 U17.5@730.72,340.04 ; C56.1@698.13,561.53 C56.1@701.13,561.53 701.13,607.53 702.13,608.53 727.13,608.53 v1(734.13,615.53) ; v1@730.13,610.53 v1@733.13,613.53 ; C75.1@1130.13,660.53 1130.13,621.53 C74.1@1131.13,620.53 v1(1131.13,598.53) ; v1(1133.13,457.53) 1133.13,449.93 1169.52,413.53 1185.13,413.53 1185.13,383.53 1210.61,358.04 U18.5@1234.72,358.04 ; C95.1@1543.13,567.53 1567.13,567.53 1585.13,585.53 v1(1585.13,613.53) ; v1(1588.13,380.53) 1592.13,376.53 1616.13,376.53 ; R116.1@1594.13,412.53 1616.13,412.53 1616.13,376.53 ; U19.5@1660.72,360.04 1656.21,355.53 1637.13,355.53 1616.13,376.53 ; v1(2005.13,455.53) 2005.13,438.53 2037.13,406.53 2062.13,406.53 2062.13,384.53 2083.13,363.53 U20.5@2106.13,363.53 ; v1(2036.99,612.15) v1@2041.13,616.28 ; U5.10@2459.12,1019.69 2509.96,1019.69 2510.13,1019.53 v1(2523.13,1032.53) ; v1(2545.13,1272.53) 2552.13,1272.53 2569.35,1255.3 U5.19@2569.35,1208.67 ; v1(2667.13,822.53) 2667.78,821.87 U5.57@2667.78,771.66 ; U5.26@2707.15,1208.67 2707.15,1247.55 2719.63,1260.03 2719.63,1263.03 v1(2719.13,1263.53) ; v1(2754,2279.31) 2754,2281.15 2755.97,2283.12 2758.23,2283.12 2771.72,2269.63 C44.2@2771.72,2260.13 2756.6,2260.13 2744.16,2247.69 2744.16,2201.5 L3.1@2780.13,2165.53 ; C38.1@2781.13,574.53 C40.2@2829.13,574.53 2878.13,574.53 C34.2@2879.13,573.53 2879.13,550.53 2882.13,547.53 v1(2886.13,547.53) ; v1(2783.13,1071.53) 2815.27,1039.38 U5.38@2896.13,1039.38
  L4 w20: C125.2@438.13,1057.53 464.13,1057.53 Y2.1@489.13,1032.53 ; v1(474.13,952.53) 475.13,951.53 489.13,965.53 Y2.1@489.13,1032.53 ; Y2.4@556.06,1032.53 Y2.1@489.13,1032.53 ; C97.1@1544.13,655.53 1573.13,655.53 1585.13,643.53 v1(1585.13,613.53) ; R59.2@2536.06,629.92 C45.2@2577.5,629.92 ; v1(2574.8,677.17) 2574.8,673.23 2577.5,670.54 C45.2@2577.5,629.92 ; C45.2@2577.5,627.9 C45.2@2577.5,629.92 ; v1(2641.8,2535.09) C15.1@2736.28,2535.09 2778.96,2535.09 C23.1@2779.59,2535.72 ; C13.1@2669.35,2192.57 v1(2669.35,2224.06)
VCC=12V: D2.1 D16.A P2.14 PJ1.1 R3.2 R4.2 | length 5110.3
  L1 w20: D2.1@3136.13,452.53 3136.13,393.53 3156.13,373.53 v1(3155.13,372.53) ; v1(3444.94,109.89) 3444.94,145.32 3450.15,150.53 R3.2@3485.13,150.53
  L1 w40: PJ1.1@1787.46,1807.53 1863.13,1807.53 1865.13,1805.53 v1(1863.13,1805.53)
  L3 w40: v1(1415.13,1621.53) 1415.13,1562.53 1300.13,1447.53 1300.13,1038.53 1403.33,935.33 1611.07,935.33 1611.87,934.53 1633.94,934.53 1860.94,707.53 v1(1866.33,707.53)
  L4 w15: 1966.13,430.02 2062.99,333.15 2062.99,110.24 2070.87,102.36 2255.91,102.36 2279.53,125.98 2279.53,188.57 2303.21,212.25
  L4 w20: R4.2@3190.13,373.53 3156.13,373.53 v1(3155.13,372.53) 3155.13,342.53 3161.48,336.17 3161.48,235.87 3196.91,200.44 3224.47,200.44 3248.09,176.82 3248.09,117.13 ; 3322.9,117.13 3366.2,160.44 D16.A@3366.2,208.32 ; 3341.25,117.13 3348.49,109.89 v1(3444.94,109.89) ; v1@3444.94,107.92 3529.59,107.92 3546.18,91.33 3620.99,91.33 v1(3626.05,86.27)
  L4 w30: 1966.13,430.02 1966.13,607.73 ; P2.14@2213.13,296.53 2218.93,296.53 2303.21,212.25 2421.33,212.25 2460.69,172.88 2460.69,121.7 2480.38,102.02 3133.92,102.02 3145.33,113.42 3145.33,117.13 3248.09,117.13 3322.9,117.13 3341.25,117.13
  L4 w40: v1(1415.13,1621.53) 1415.13,1625.53 1460.13,1670.53 1728.13,1670.53 v1(1863.13,1805.53) ; v1(1866.33,707.53) 1966.13,607.73
pads on no net: J1.A J1.B M2.4 M2.9 M2.13 M2.14 M2.15 M2.16 M2.17 M2.18 P5.6 P5.7 PJ1. S1.1 S1.3 TS1.3 TS1.4 TS1.6 U4.1 U4.4 U4.5 U4.6 U4.7 U4.24 U5.34 U5.35 U6.1 U6.4 U6.5 U6.6 U6.7 U6.24 U7.7 U8.1 U8.4 U8.5 U8.6 U8.7 U8.24 U9.1 U9.4 U9.5 U9.6 U9.7 U9.24 U10.1 U10.4 U10.5 U10.6 U10.7 U10.24 U21.3 U21.4

## Polygon pours and split planes (outlines as drawn)
GND on L4 "Top Layer-No Net" (solid, pour order 4): 2530.13,1151.53 2536.13,1157.53 2824.13,1157.53 2824.13,837.53 2829.13,832.53 2826.13,835.53 2524.13,835.53 2524.13,1156.53 2526.13,1158.53 2527.13,1157.53 2540.13,1157.53
GND on L4 "Top Layer-No Net" (solid, pour order 12): 2413.39,2181.1 2413.39,1669.29 2429.13,1653.54 2433.07,1649.61 2881.89,1649.61 2881.89,2165.35 2870.08,2177.17
no net on L1 "Top Layer-No Net" (solid, pour order 8): 3440.94,629.92 3444.88,625.98 3740.16,625.98 3826.77,625.98 3870.08,582.68 3881.89,570.87 3881.89,125.98 3877.95,125.98 3807.09,55.12 3803.15,59.06 3464.57,59.06 3452.76,59.06 3448.82,55.12 3445.41,58.53 3439.13,58.53 3439.13,620.23 3444.88,625.98
GND on L2 "Top Layer-No Net" (solid, pour order 10): 547.24,834.65 547.24,401.57 555.12,393.7 586.61,362.2 2444.88,362.2 2444.88,822.83 2429.13,838.58
VCC=3.3V on Power (split plane): 2919.92,2589.32 2929.03,2580.2 2929.03,1530.53 2929.42,1526.61 2930.56,1522.84 2932.42,1519.36 2934.92,1516.32 2937.96,1513.82 2941.44,1511.96 2945.21,1510.82 2949.13,1510.43 3915.03,1510.43 3915.03,28.62 20.22,28.62 20.22,1510.43 1294.13,1510.43 1298.05,1510.82 1301.82,1511.96 1305.29,1513.82 1308.34,1516.32 1311.34,1519.32 1313.84,1522.36 1315.69,1525.84 1316.84,1529.61 1317.22,1533.53 1316.84,1537.45 1315.69,1541.22 1313.84,1544.69 1311.34,1547.74 1311.22,1547.85 1311.22,1918.53 1904.13,1918.53 1904.13,1755.53 2222.13,1755.53 2222.13,2592.43 2916.8,2592.43
GND on CommonGND (split plane): 2919.92,2589.32 2929.03,2580.2 2929.03,1530.53 2929.42,1526.61 2930.56,1522.84 2932.42,1519.36 2934.92,1516.32 2937.96,1513.82 2941.44,1511.96 2945.21,1510.82 2949.13,1510.43 3915.03,1510.43 3915.03,28.62 20.22,28.62 20.22,1510.43 1294.13,1510.43 1298.05,1510.82 1301.82,1511.96 1305.29,1513.82 1308.34,1516.32 1311.34,1519.32 1313.84,1522.36 1315.69,1525.84 1316.84,1529.61 1317.22,1533.53 1316.84,1537.45 1315.69,1541.22 1313.84,1544.69 1311.34,1547.74 1311.22,1547.85 1311.22,1922.53 1930.13,1922.53 1930.13,1767.53 1926.13,1763.53 1930.13,1759.53 2260.13,1760.53 2261.13,1961.53 2261.13,2587.53 1311.22,2587.53 1311.22,2592.43 2916.8,2592.43

## Keep-outs
Keep-Out Layer:
  lines w19.68: -3.87,29.53 -3.87,1594.53 ; -0.87,1607.53 1288.13,1607.53 1288.13,2614.53 2929.13,2614.53 2929.13,1607.53 3936.13,1607.53 ; 2.13,29.53 3936.13,29.53
  lines w20: 3936.13,29.53 3936.13,1607.53

## Other copper
CommonGND (plane layer: these items are gaps in the copper):
  pour cut-out: 1294.13,1922.53 1930.13,1922.53 1930.13,1767.53 1926.13,1763.53 1930.13,1759.53 2260.13,1760.53 2261.13,1961.53 2261.13,2587.53 1286.13,2587.53 1286.13,1929.53 1275.13,1918.53
Power (plane layer: these items are gaps in the copper):
  pour cut-out: 1279.13,1914.53 1283.13,1918.53 1904.13,1918.53 1904.13,1755.53 2222.13,1755.53 2222.13,2624.53 2218.13,2628.53 2210.13,2620.53 1283.13,2620.53 1283.13,1922.53

## Silkscreen, mask and mechanical layers (free items; w line width, h text height)
Top Overlay:
  lines w5: 1158.13,1612.53 1163.13,1607.53 ; 2647.37,1798.28 2647.37,1792.92 2647.37,1797.28 2633.13,1811.53 2633.13,1920.41 2647.37,1934.65 ; 2664.1,1776.19 2664.1,1775.55 2679.13,1760.53 2790.17,1760.53 2805.83,1776.19 ; 2664.1,1951.39 2664.1,1953.5 2678.13,1967.53 2789.69,1967.53 2805.83,1951.39 ; 2822.57,1792.92 2831.73,1802.09 2836.13,1802.09 2836.13,1806.48 2836.13,1920.53 2822.57,1934.09 2822.57,1934.65
  lines w10: -437.87,65.38 -417.87,5.38 ; -437.87,2543.79 -417.87,2603.79 ; -427.87,5.38 -407.87,5.38 ; -427.87,2603.79 -407.87,2603.79 ; -417.87,913.71 -417.87,5.38 ; -417.87,1695.47 -417.87,2603.79 ; -397.87,65.38 -417.87,5.38 ; -397.87,2543.79 -417.87,2603.79 ; -1.88,-198.47 -1.87,-178.47 ; 58.11,-208.52 -1.87,-188.47 ; 58.14,-168.52 -1.87,-188.47 ; 1300.17,2861.6 1300.21,2881.6 ; 1360.15,2851.48 1300.19,2871.6 ; 1360.23,2891.48 1300.19,2871.6 ; 1571.25,-189.67 -1.87,-188.47 ; 1726.39,2870.8 1300.19,2871.6 ; 2353,-190.27 3926.13,-191.47 ; 2488.15,2869.39 2914.35,2868.6 ; 2854.32,2848.71 2914.35,2868.6 ; 2854.39,2888.71 2914.35,2868.6 ; 2914.34,2858.6 2914.37,2878.6 ; 3866.11,-211.43 3926.13,-191.47 ; 3866.14,-171.43 3926.13,-191.47 ; 3926.12,-201.47 3926.13,-181.47
  lines w15.75: 1913.13,504.53 1913.13,512.53
  lines w19.68: -3.87,16.53 -3.87,1542.53 ; 45.13,1594.53 1238.13,1594.53 ; 1291.13,1640.53 1291.13,2560.53 ; 1350.13,2614.53 2881.13,2614.53 ; 2936.13,1658.53 2936.13,2566.53 ; 2991.13,1602.53 3890.13,1602.53 ; 3935.63,5.53 3935.63,1555.53
  lines w20: -3.87,5.53 3935.63,5.53 ; 0.13,1542.53 cw(c33.23,1559.47) 50.13,1592.59 ; 1235.13,1597.53 ccw(c1240.54,1642.11) 1285.13,1647.53 ; 1291.13,2564.53 cw(c1334.79,2570.87) 1341.13,2614.53 ; 2886.16,2614.16 cw(c2888.3,2566.3) 2936.13,2563.53 ; 2936.13,1652.53 ccw(c2976.4,1642.81) 2986.13,1602.53 ; 3889.73,1604.07 cw(c3891.16,1562.02) 3933.15,1564.6 ; 3935.63,1528.53 3935.63,49.03 3938.13,46.53
  text "1614.168 (mil)" at 1736.32,2834.8 h60 r359.89
  text "2598.414 (mil)" at -381.88,923.71 h60 r90
  text "3928.001 (mil)" at 1581.22,-225.67 h60 r359.96
Bottom Overlay:
  circle w10: c2489.13,814.53 r6.32
  circle w0: c570.87,322.83 r59.06
  circle w0: c1031.5,444.88 r59.06
  circle w0: c1504.87,492.13 r62.99
  circle w0: c2346.46,598.43 r59.06
  circle w0: c157.48,397.64 r59.06
  lines w15: 48.13,5.53 50.13,3.53
  text "TP5" at 2665.13,1796.53 h20
  text "TP30" at 2377.95,551.18 h20
  text "TP29" at 1539.37,448.82 h20
  text "TP28" at 1070.87,401.57 h20
  text "TP26" at 192.91,354.33 h20
  text "TP27" at 598.43,279.53 h20
  text "©OpenStrom licensed under CC-BY-SA" at 1125.98,165.35 h60
  text "Rev.0.8" at 401.57,106.3 h30
Mechanical 1:
  lines w10: 5.13,38.53 0.13,33.53 4182.13,33.53 4189.13,26.53 ; 1225.13,2099.53 1232.13,2106.53
Mechanical 15:
  lines w11.81: 1913.13,2565.53 1907.13,2559.53 1907.13,1873.53 1911.13,1869.53 2446.13,1869.53 2454.13,1861.53 2454.13,2562.53 2451.13,2565.53 1933.13,2565.53

## Text inside footprints (layer, text, board x,y; h text height)
BT1: Top Overlay "+" at 2028.64,131.81 h45.28